# Altium PCB PIR.PcbDoc
Units mm, origin at the board's own origin, x right, y up, seen from the top; angles counter-clockwise.
Board outline 40.88 x 23.94 mm, 2 copper layers (Top Layer, Bottom Layer); 13 components, 7 nets, 25 pads, 51 vias.
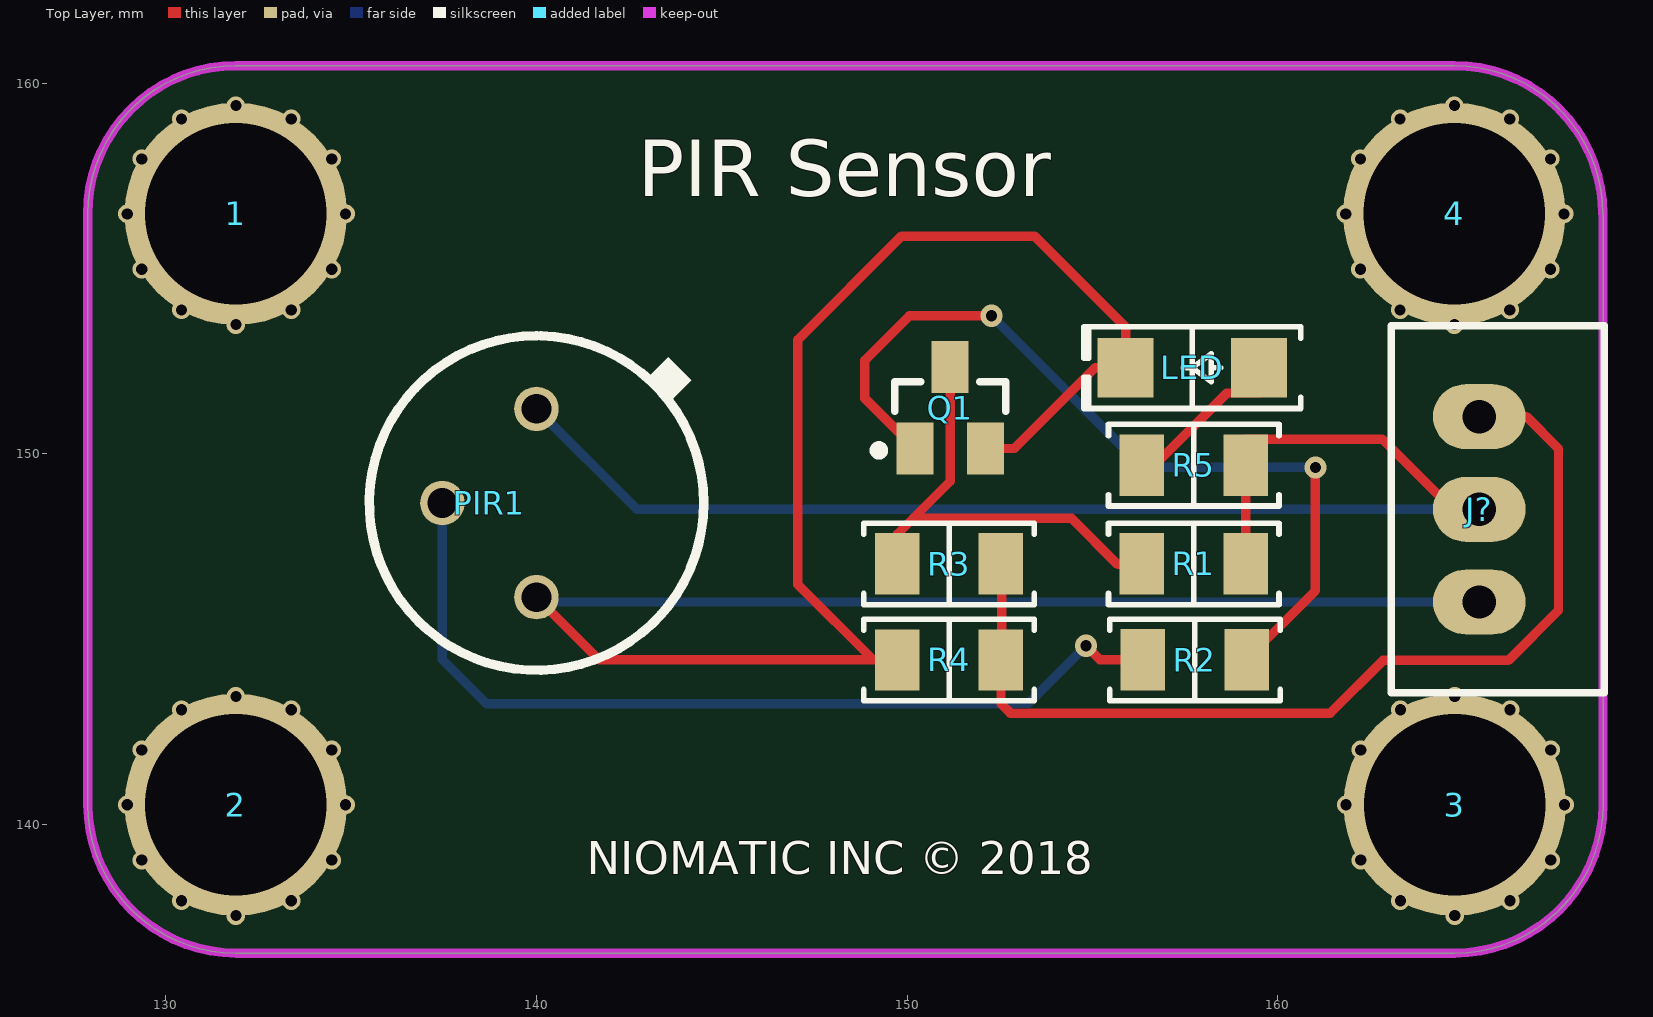
[diagram p0: Top Layer view]
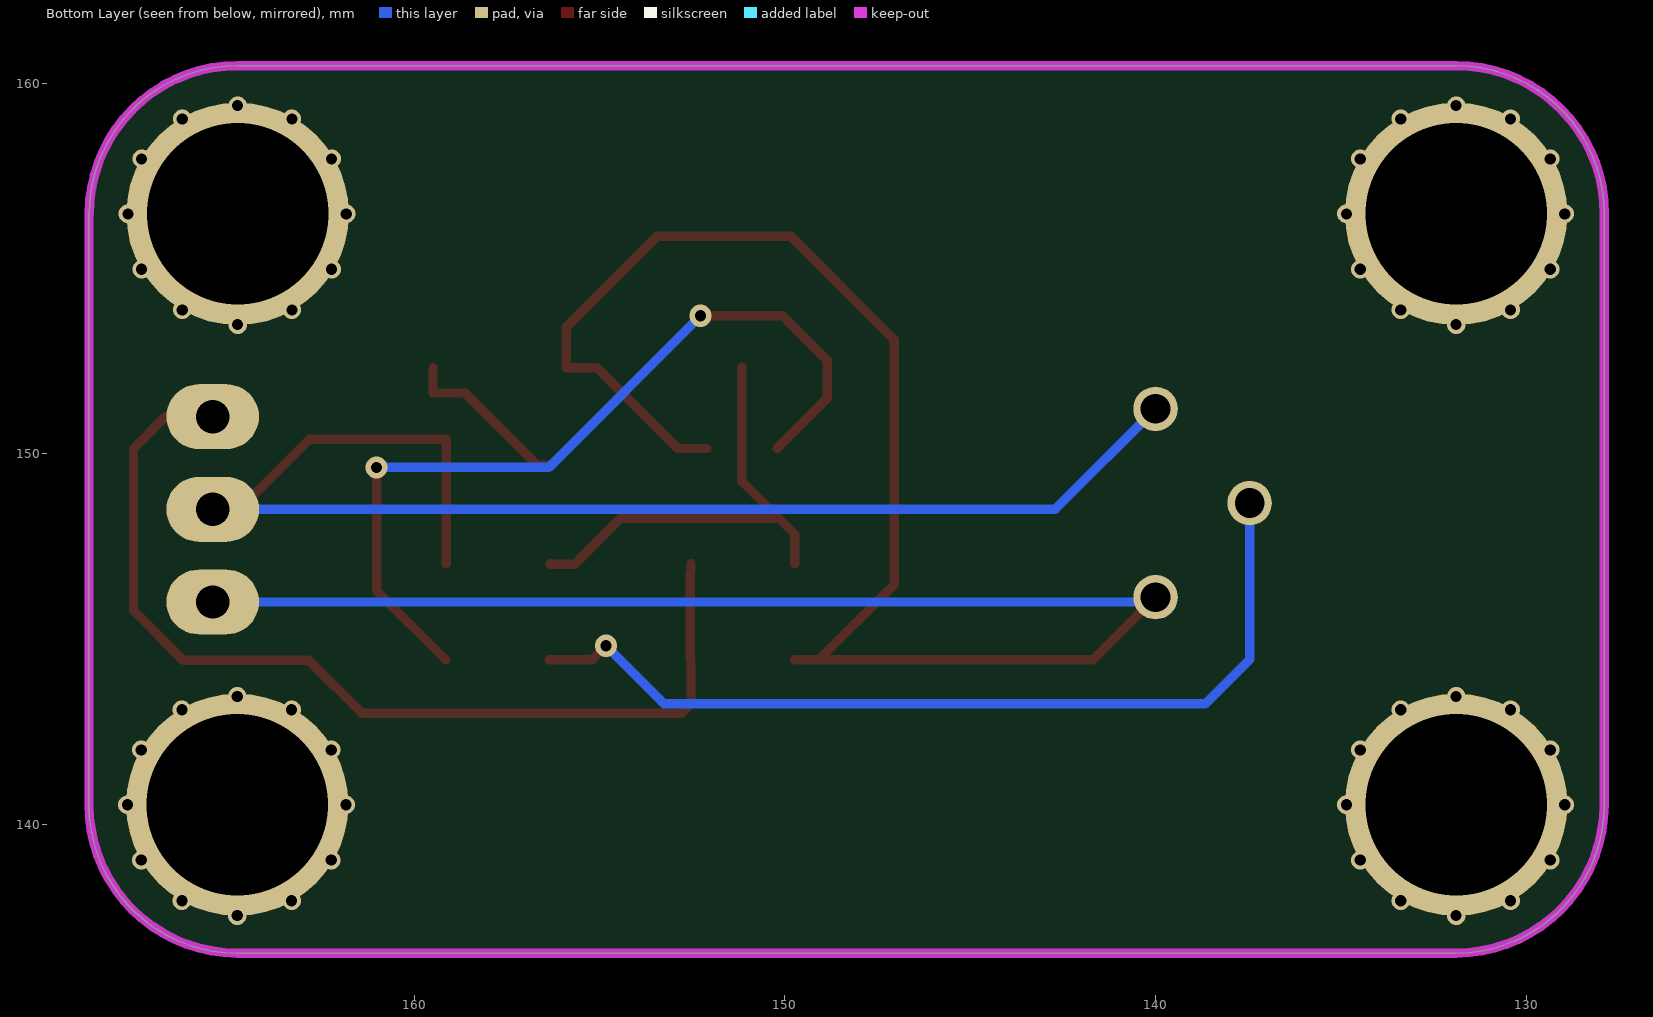
[diagram p1: Bottom Layer view, seen from below]
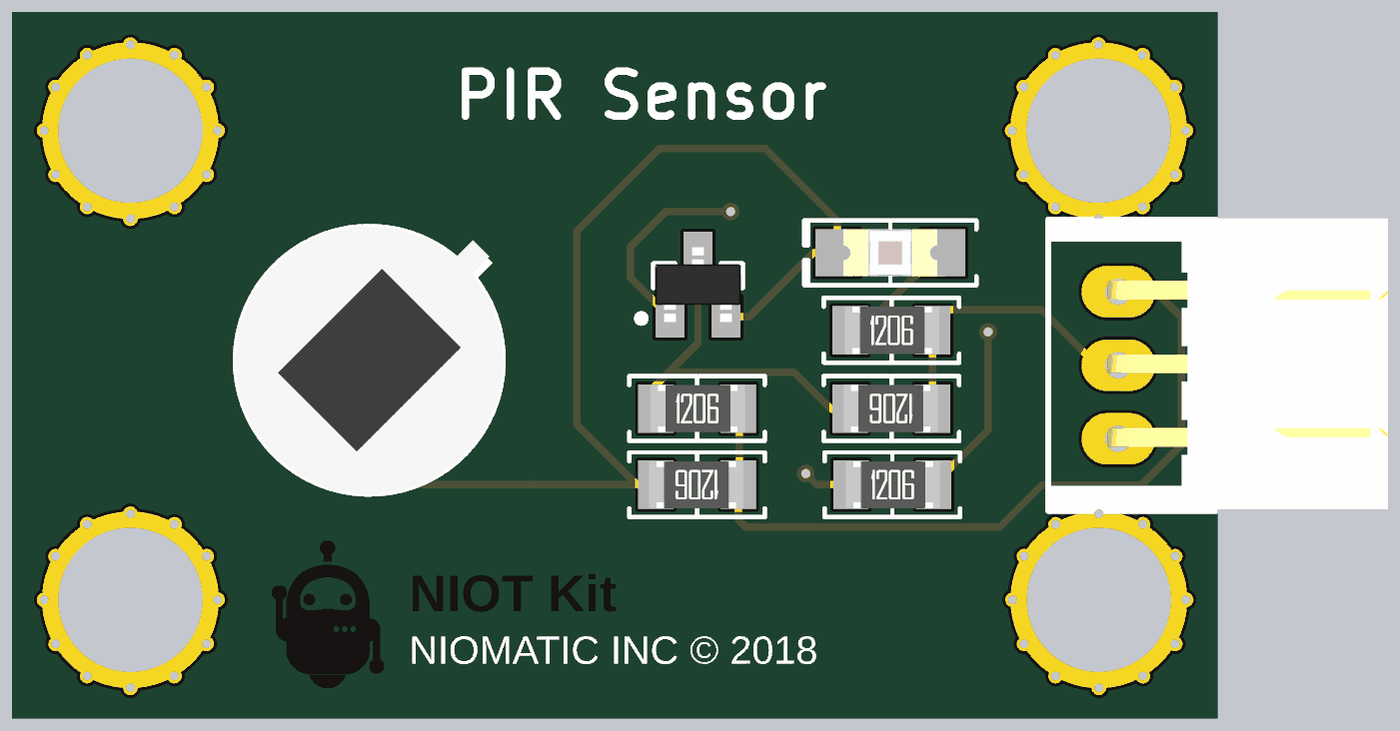
[diagram p2: 3D render of the assembled board from above, using the file's embedded part models]

## Layer stack, top to bottom
Top Solder: solder mask 0.0102, Solder Resist, Dk 3.5
Top Layer: signal copper 0.0356
Dielectric 1: dielectric 0.32, FR-4, Dk 4.8
Bottom Layer: signal copper 0.0356
Bottom Solder: solder mask 0.0102, Solder Resist, Dk 3.5

## Board outline
127.891,140.53 127.891,156.47 cw(c131.891,156.47) 131.891,160.47 164.761,160.47 cw(c164.761,156.47) 168.761,156.47 168.77,156.47 168.77,140.53 cw(c164.77,140.53) 164.77,136.53 131.9,136.53 cw(c131.9,140.53)

## Design rules (kind name [scope] priority, off if disabled: settings)
Clearance [All] p1: gap=0.254 ignorepadtopadclearanceinfootprint=FALSE except(0: Arc-Hole Track-Hole SMDPad-Hole THPad-Hole Via-Hole Fill-Hole Poly-Hole Region-Hole Text-Hole)
PolygonConnect [All] p1: connectstyle=Relief reliefconductorwidth=0.254 reliefentries=4 polygonreliefangle="90 Angle" airgapwidth=0.254
RoomDefinition PIR [InComponentClass('PIR')] p1: confinementstyle=ConfineIn formatcopy=TRUE lockcomponents=FALSE outline 178.943,26.924 198.247,26.924 198.247,44.577 178.943,44.577
RoutingVias [All] p1: holewidth=0.711 width=1.27 viastyle="Through Hole" minholewidth=0.711 minwidth=1.27 maxholewidth=0.711 maxwidth=1.27
SolderMaskExpansion [All] p1: expansion=0.102
Width [All] p1: maxlimit=0.254 minlimit=0.254 preferedwidth=0.254
30 further rules are at their usual default settings.

## Components (designator, comment, footprint, x,y, rotation, side; value= is the part's Value field where it differs from the comment)
1 "Lego" "Lego Hole" 131.89,156.47 r90 top
2 "Lego" "Lego Hole" 131.89,140.53 r90 top
3 "Lego" "Lego Hole" 164.771,140.53 r90 top
4 "Lego" "Lego Hole" 164.761,156.47 r90 top
J? "Header" "JST XH B3B-XH-A - RIGHT" 165.433,148.5 r90 top
LED "RED" "LED 1206/3216 RED" 157.69,152.32 r180 top value=Green
PIR1 "D203B" D203B 140,148.67 r90 top
Q1 "2N2222" SOT23 151.16,151.24 r90 top
R1 "1K" "RES 1206/3216" 157.73,147.03 r180 top
R2 "1K" "RES 1206/3216" 157.76,144.44 r0 top
R3 "1K" "RES 1206/3216" 151.13,147.03 r0 top
R4 "1K" "RES 1206/3216" 151.13,144.44 r180 top
R5 "1K" "RES 1206/3216" 157.73,149.69 r0 top

## Footprints (in the part's own frame and the unit in brackets; to place one, negate y for a bottom-side part, rotate by r counter-clockwise, add the part's x,y. Pads: shape width x height; smd on the part's side, far side on the other; paste and mask are expansions set on the pad)
D203B [mil]
  round 47.25 / inner round 60 / far side round 47.25 hole 31.5: 1(100,0) 2(0,100) 3(-100,0)
  silkscreen extent -177,-178 178,177, body extent -255,-277 277,255, height 211
"JST XH B3B-XH-A - RIGHT" [mm]
  oval 1.75x2.5 hole 0.9: 1(-2.5,0) 2(0,0) 3(2.5,0)
  silkscreen extent -4.95,-3.38 4.95,2.38, body extent -4.9,-9.15 5,2.35, height 6.1
"LED 1206/3216 RED" [mm] "Chip Diode, 2-Leads, Body 3.13x1.55mm, IPC Medium Density"
  rect 1.5x1.6 smd: 1(-1.8,0) 2(1.8,0)
  silkscreen extent -2.92,-1.1 2.92,1.1, body extent -1.6,-0.8 1.6,0.8, height 0.9
"Lego Hole" [mm]
  round 6 hole 4.9: 0(0,0)
"RES 1206/3216" [mm] "Chip Resistor, 2-Leads, Body 3.13x1.55mm, IPC Medium Density"
  rect 1.2x1.65 smd: 1(-1.4,0) 2(1.4,0)
  silkscreen extent -2.3,-1.1 2.3,1.1, body extent -1.57,-0.8 1.62,0.8, height 0.6
SOT23 [mm]
  rect 1.4x1 smd: B(-1.1,0.95) C(1.1,0) E(-1.1,-0.95)
  silkscreen extent -1.27,-1.5 0.7,2.05, body extent -1.27,-1.46 1.27,1.46, height 1

## Part data
J?: library part "3 Pin"
LED: library part LED, "Chip LED"
PIR1: Package=3PIN, DeviceSetName=D203B, GateName_1=G$1, LibraryName=senba-pir-sensor, SymbolName_1=3PIN
Q1: "NPN", De="Seyed Mohsen Ghasemian", E-mail=picpars@gmail.com, web=www.picpars.com
R1 R2 R3 R4 R5: library part Resistor, "SMT Resistor"

## Via types
v1: diameter 0.5, hole 0.3, Top Layer to Bottom Layer, 48 vias
v2: diameter 0.6, hole 0.3, Top Layer to Bottom Layer, tented both sides, 3 vias

## Nets (pads, with @x,y where several pads share a name; then routed paths per layer and width w, separated by ;. In a path a pad name is that pad's centre, name@x,y a point inside that pad or via, vN(x,y) a via of type N, cw(c..) or ccw(c..) an arc to the next point about the centre after c; other vN are vias at no path point)
Data: J?.3 R3.2 R4.1 | length 27
  Top Layer w0.254: R3.2 152.53,146.812 152.552,146.812 152.552,144.462 R4.1 152.53,143.256 152.784,143.002 161.412,143.002 162.834,144.424 166.218,144.424 167.57,145.777 167.57,150.133 166.703,151 J?.3
GND: J?.1 LED.2 PIR1.3 Q1.E R4.2 | length 62.2
  Top Layer w0.254: PIR1.3@140,146.13 141.69,144.44 149.082,144.44 ; R4.2 149.082,144.44 ; Q1.E 152.89,150.14 155.07,152.32 155.89,152.32 155.89,153.416 153.436,155.87 149.85,155.87 147.05,153.07 147.05,146.472 149.082,144.44
  Bottom Layer w0.254: PIR1.3@140,146.13 140.13,146 J?.1
NetLED_1: LED.1 R5.1 | length 4.6
  Top Layer w0.254: R5.1 156.675,149.69 158.623,151.638 159.49,151.638 LED.1@159.49,152.32
NetPIR1_2: PIR1.2 R2.1 | length 24.4
  Top Layer w0.254: v2(154.82,144.82) 155.2,144.44 R2.1
  Bottom Layer w0.254: PIR1.2@137.46,148.67 137.46,144.45 138.66,143.25 153.25,143.25 v2(154.82,144.82)
NetQ1_B: Q1.B R2.2 | length 23.3
  Top Layer w0.254: Q1.B 148.86,151.49 148.86,152.52 150.061,153.721 v2(152.273,153.721) ; R2.2 159.147,144.44 161.011,146.304 v2(161.011,149.631)
  Bottom Layer w0.254: v2(152.273,153.721) 156.362,149.631 v2(161.011,149.631)
NetQ1_C: Q1.C R1.2 R3.1 | length 12.6
  Top Layer w0.254: R3.1 149.73,147.828 150.162,148.26 ; Q1.C 151.16,149.258 150.162,148.26 ; R1.2 156.33,147.015 155.677,147.015 154.432,148.26 150.162,148.26
VCC: J?.2 PIR1.1 R1.1 R5.2 | length 37
  Top Layer w0.254: R1.1 R5.2 159.13,150.39 162.82,150.39 164.71,148.5 J?.2
  Bottom Layer w0.254: PIR1.1@140,151.21 142.71,148.5 J?.2
pads on no net: 1.0 2.0 3.0 4.0
copper on no net:
  other v1: 131.89,137.541 164.771,137.541 130.424,137.941 133.385,137.941 163.305,137.941 166.266,137.941 129.352,139.036 134.479,139.036 162.233,139.036 167.36,139.036 128.96,140.53 134.85,140.53 161.841,140.53 167.731,140.53 129.352,142.011 134.479,142.011 162.233,142.011 167.36,142.011 130.424,143.094 133.385,143.094 163.305,143.094 166.266,143.094 131.89,143.451 164.771,143.451 131.89,153.481 164.761,153.481 130.424,153.881 133.385,153.881 163.295,153.881 166.256,153.881 129.352,154.976 134.479,154.976 162.223,154.976 167.35,154.976 128.96,156.47 134.85,156.47 161.831,156.47 167.721,156.47 129.352,157.951 134.479,157.951 162.223,157.951 167.35,157.951 130.424,159.034 133.385,159.034 163.295,159.034 166.256,159.034 131.89,159.391 164.761,159.391

## Keep-outs
Keep-Out Layer:
  lines w0.254: 127.891,140.53 127.891,156.47 cw(c131.891,156.47) 131.891,160.47 164.761,160.47 cw(c164.761,156.47) 168.761,156.47 ; 127.9,140.53 ccw(c131.9,140.53) 131.9,136.53 164.77,136.53 ccw(c164.77,140.53) 168.77,140.53 168.77,156.47

## Silkscreen, mask and mechanical layers (free items; w line width, h text height)
Top Overlay:
  text "PIR Sensor" at 142.73,156.95 h1.52
  text "NIOMATIC INC © 2018" at 141.35,138.359 h1.52
Top Solder:
  drawing of 381 lines, arcs and shapes, not listed
  text "NIOT Kit" at 141.35,140.139 h2